# Altium PCB ARDUINO NANO.pcbdoc
Units mil, origin at the board's own origin, x right, y up, seen from the top; angles counter-clockwise.
Board outline 1993.67 x 2741.83 mil, 2 copper layers (Top Layer, Bottom Layer); 1 components, 0 nets, 30 pads, 0 vias.
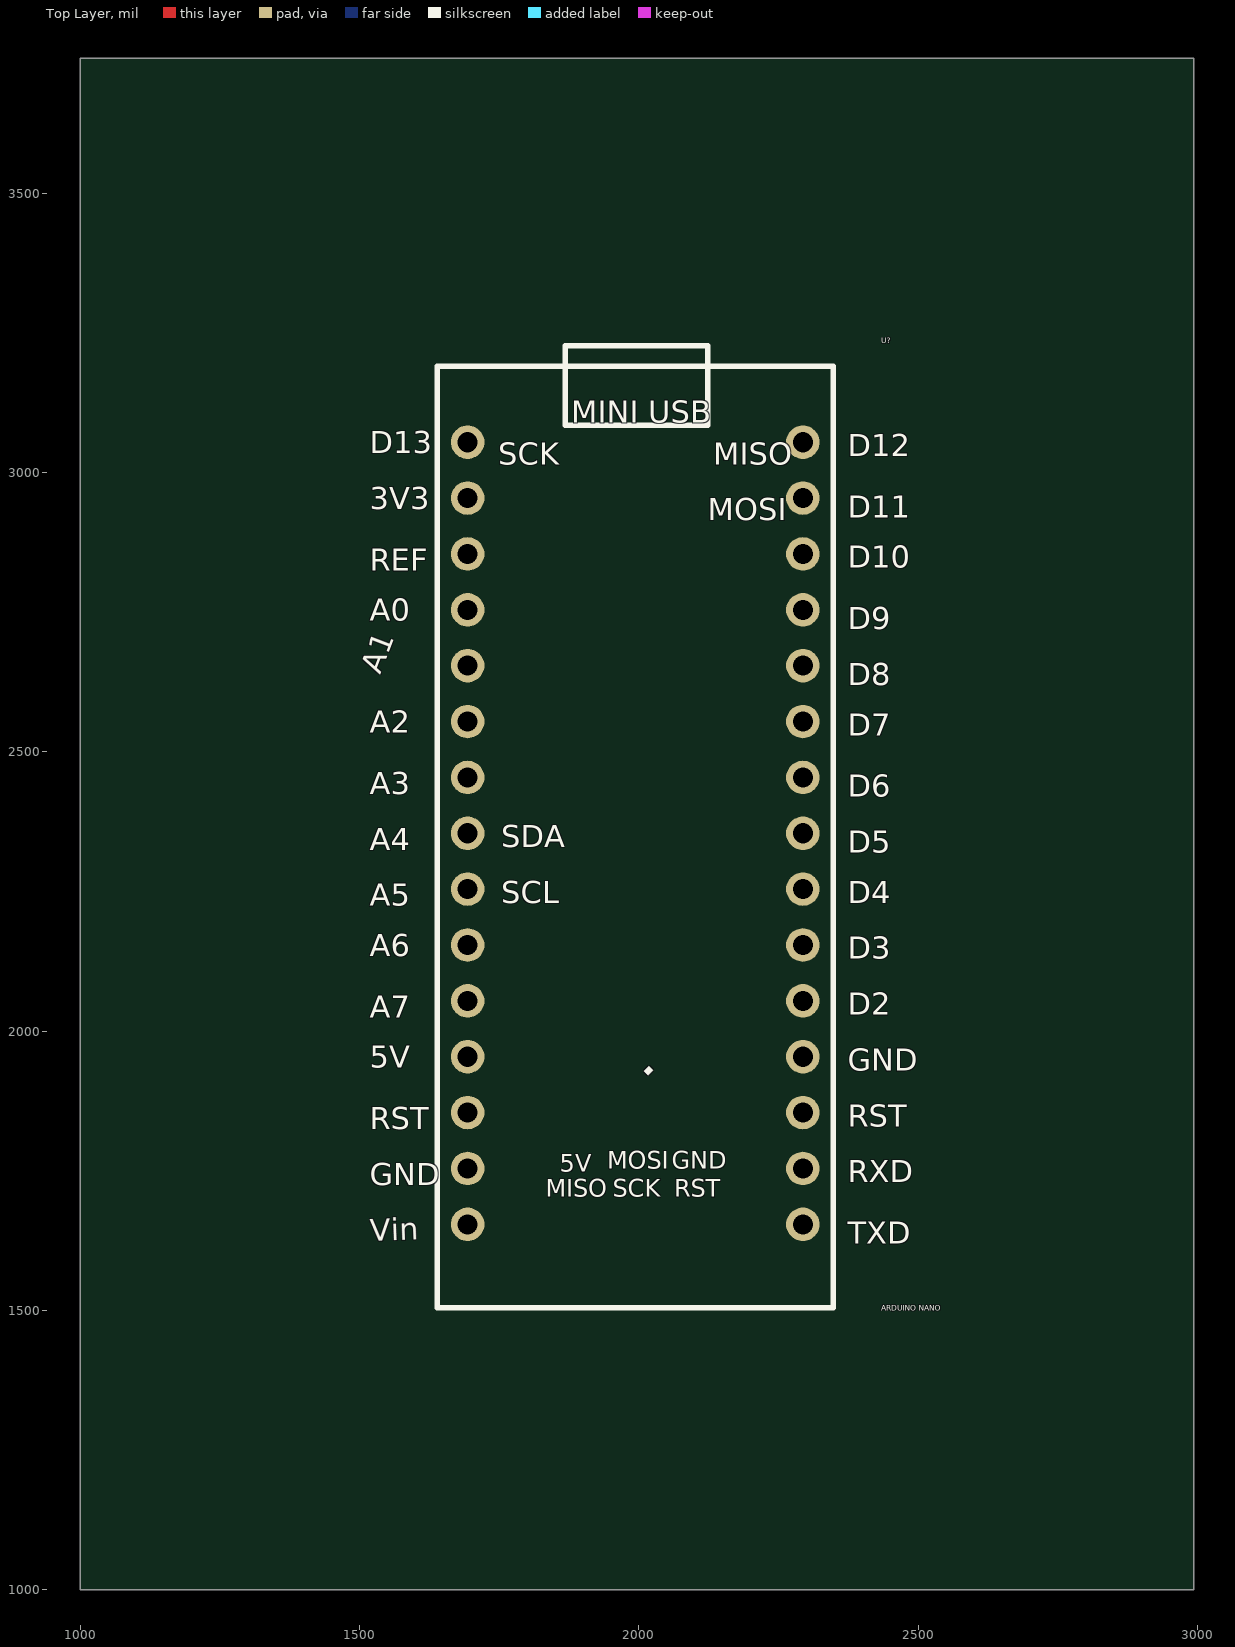
[diagram p0: Top Layer view]
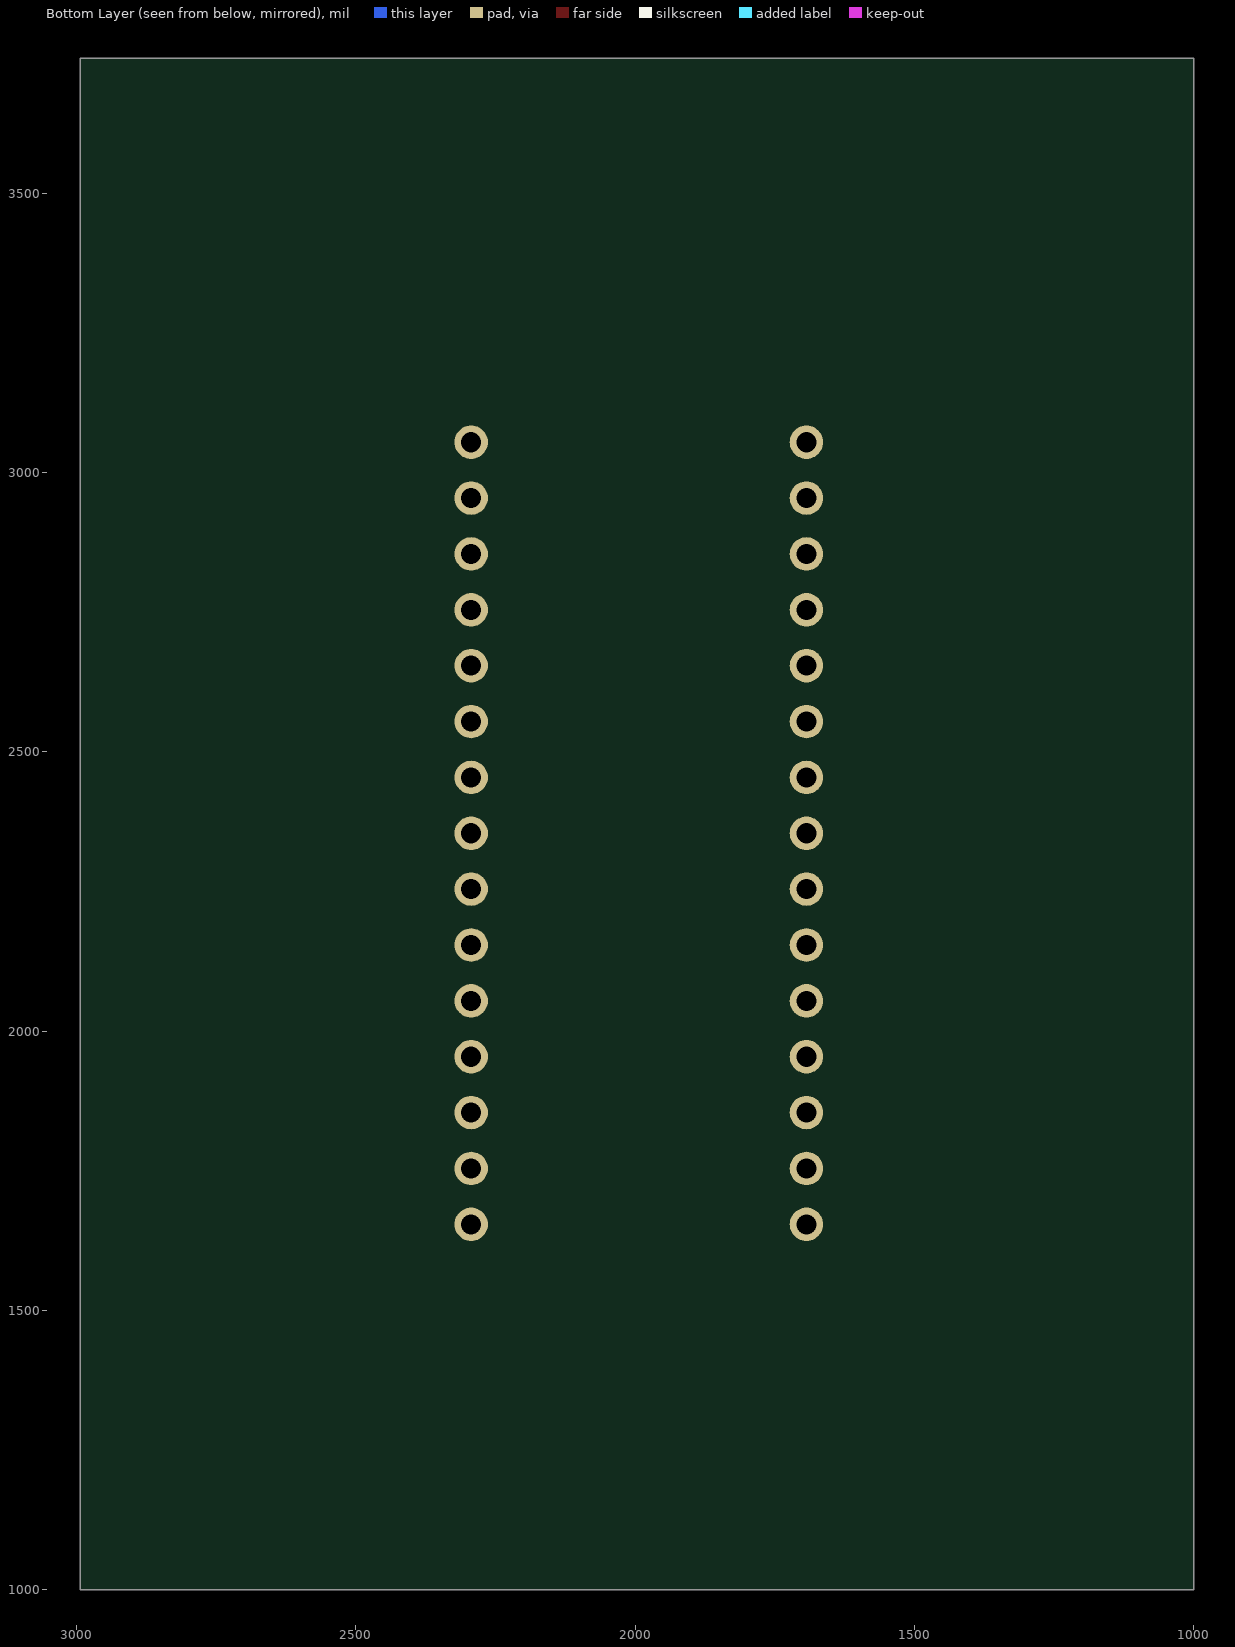
[diagram p1: Bottom Layer view, seen from below]

## Layer stack, top to bottom
Top Solder: solder mask 0.4, Solder Resist, Dk 3.5
Top Layer: signal copper 1.4
Dielectric1: dielectric 12.6, FR-4, Dk 4.8
Bottom Layer: signal copper 1.4
Bottom Solder: solder mask 0.4, Solder Resist, Dk 3.5

## Board outline
2993.67,1000 1000,1000 1000,3741.83 2993.67,3741.83

## Design rules (kind name [scope] priority, off if disabled: settings)
Clearance [All] p1: gap=10 ignorepadtopadclearanceinfootprint=FALSE except(0: Arc-Hole Track-Hole SMDPad-Hole THPad-Hole Via-Hole Fill-Hole Poly-Hole Region-Hole Text-Hole)
PolygonConnect [All] p1: connectstyle=Relief reliefconductorwidth=10 reliefentries=4 polygonreliefangle="90 Angle" airgapwidth=10
RoutingVias [All] p1: holewidth=28 width=50 viastyle="Through Hole" minholewidth=28 minwidth=50 maxholewidth=28 maxwidth=50
SolderMaskExpansion [All] p1: expansion=4 istentingtop=FALSE
Width [All] p1: maxlimit=10 minlimit=10 preferedwidth=10
30 further rules are at their usual default settings.

## Components (designator, comment, footprint, x,y, rotation, side; value= is the part's Value field where it differs from the comment)
U? "ARDUINO NANO" "ARDUINO NANO" 1966.84,2365.91 r0 top

## Footprints (in the part's own frame and the unit in brackets; to place one, negate y for a bottom-side part, rotate by r counter-clockwise, add the part's x,y. Pads: shape width x height; smd on the part's side, far side on the other; paste and mask are expansions set on the pad)
"ARDUINO NANO" [mil]
  round 60 hole 35.98 paste+0 mask+4: 1(326.84,-711.59) 2(326.84,-611.59) 3(326.84,-511.59) 4(326.84,-411.59) 5(326.84,-311.59) 6(326.84,-211.59) 7(326.84,-111.59) 8(326.84,-11.59) 9(326.84,88.41) 10(326.84,188.41) 11(326.84,288.41) 12(326.84,388.41) 13(326.84,488.41) 14(326.84,588.41) 15(326.84,688.41) 16(-273.16,688.41) 17(-273.16,588.41) 18(-273.16,488.41) 19(-273.16,388.41) 20(-273.16,288.41) 21(-273.16,188.41) 22(-273.16,88.41) 23(-273.16,-11.59) 24(-273.16,-111.59) 25(-273.16,-211.59) 26(-273.16,-311.59) 27(-273.16,-411.59) 28(-273.16,-511.59) 29(-273.16,-611.59) 30(-273.16,-711.59)
  silkscreen extent -327,-861 382,861

## Nets (pads, with @x,y where several pads share a name; then routed paths per layer and width w, separated by ;. In a path a pad name is that pad's centre, name@x,y a point inside that pad or via, vN(x,y) a via of type N, cw(c..) or ccw(c..) an arc to the next point about the centre after c; other vN are vias at no path point)
pads on no net: U?.1 U?.2 U?.3 U?.4 U?.5 U?.6 U?.7 U?.8 U?.9 U?.10 U?.11 U?.12 U?.13 U?.14 U?.15 U?.16 U?.17 U?.18 U?.19 U?.20 U?.21 U?.22 U?.23 U?.24 U?.25 U?.26 U?.27 U?.28 U?.29 U?.30

## Silkscreen, mask and mechanical layers (free items; w line width, h text height)
Document:
  lines w0.1: 1996.83,2370.91 1996.85,2370.93

## Text inside footprints (layer, text, board x,y; h text height)
U?: Top Overlay "RST" at 1518.67,1824.33 h40; Top Overlay "A7" at 1518.67,2024.33 h40; Top Overlay "A6" at 1518.67,2134.33 h40; Top Overlay "A5" at 1518.67,2224.33 h40; Top Overlay "A4" at 1518.67,2324.33 h40; Top Overlay "A3" at 1518.67,2424.33 h40; Top Overlay "A2" at 1518.67,2534.33 h40; Top Overlay "A1" at 1537.34,2637.16 h40 r69; Top Overlay "A0" at 1518.67,2734.33 h40; Top Overlay "REF" at 1518.67,2824.33 h40; Top Overlay "3V3" at 1518.67,2934.33 h40; Top Overlay "D13" at 1518.67,3034.33 h40; Top Overlay "Vin" at 1519.37,1624.34 h40 r2; Top Overlay "5V" at 1518.67,1934.33 h40; Top Overlay "GND" at 1518.67,1724.33 h40; Top Overlay "TXD" at 2373.67,1619.33 h40; Top Overlay "D12" at 2373.67,3029.33 h40; Top Overlay "GND" at 2373.67,1929.33 h40; Top Overlay "RXD" at 2373.67,1729.33 h40; Top Overlay "RST" at 2373.67,1829.33 h40; Top Overlay "D2" at 2373.67,2029.33 h40; Top Overlay "D3" at 2373.67,2129.33 h40; Top Overlay "D4" at 2373.67,2229.33 h40; Top Overlay "D5" at 2373.67,2319.33 h40; Top Overlay "D6" at 2373.67,2419.33 h40; Top Overlay "D7" at 2373.67,2529.33 h40; Top Overlay "D8" at 2373.67,2619.33 h40; Top Overlay "D9" at 2373.67,2719.33 h40; Top Overlay "D10" at 2373.67,2829.33 h40; Top Overlay "D11" at 2373.67,2919.33 h40; Top Overlay "SDA" at 1753.67,2329.33 h40; Top Overlay "SCL" at 1753.67,2229.33 h40; Top Overlay "5V" at 1858.67,1748.58 h31.5; Top Overlay "MOSI" at 1943.67,1753.58 h31.5; Top Overlay "GND" at 2058.67,1753.58 h31.5; Top Overlay "RST" at 2063.67,1703.58 h31.5; Top Overlay "SCK" at 1953.67,1703.58 h31.5; Top Overlay "MISO" at 1833.67,1703.58 h31.5; Top Overlay "MINI USB" at 1878.67,3089.33 h40; Top Overlay "SCK" at 1748.67,3014.33 h40; Top Overlay "MOSI" at 2123.67,2914.33 h40; Top Overlay "MISO" at 2133.67,3014.33 h40